# Altium PCB bloodhound_gprs_0_beta.PcbDoc
Units mil, origin at the board's own origin, x right, y up, seen from the top; angles counter-clockwise.
Board outline 1535.43 x 1889.76 mil, 2 copper layers (Top Layer, Bottom Layer); 33 components, 31 nets, 157 pads, 25 vias.
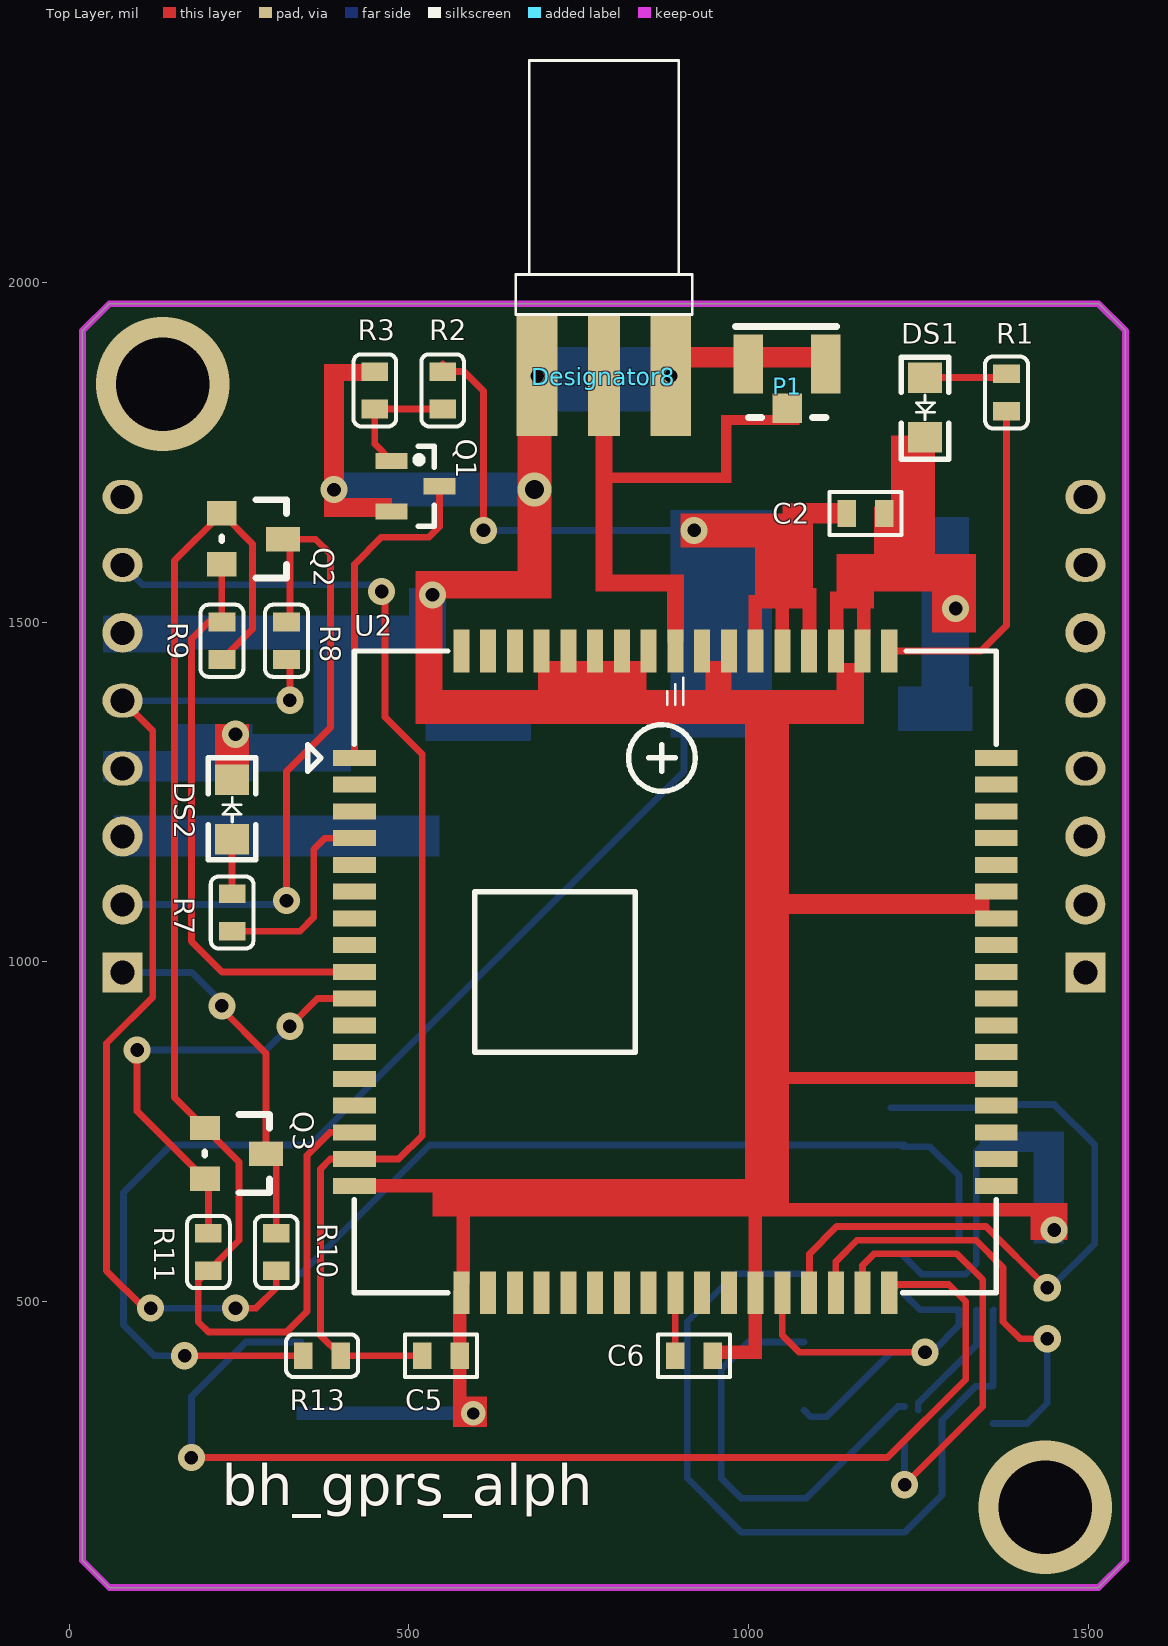
[diagram p0: Top Layer view]
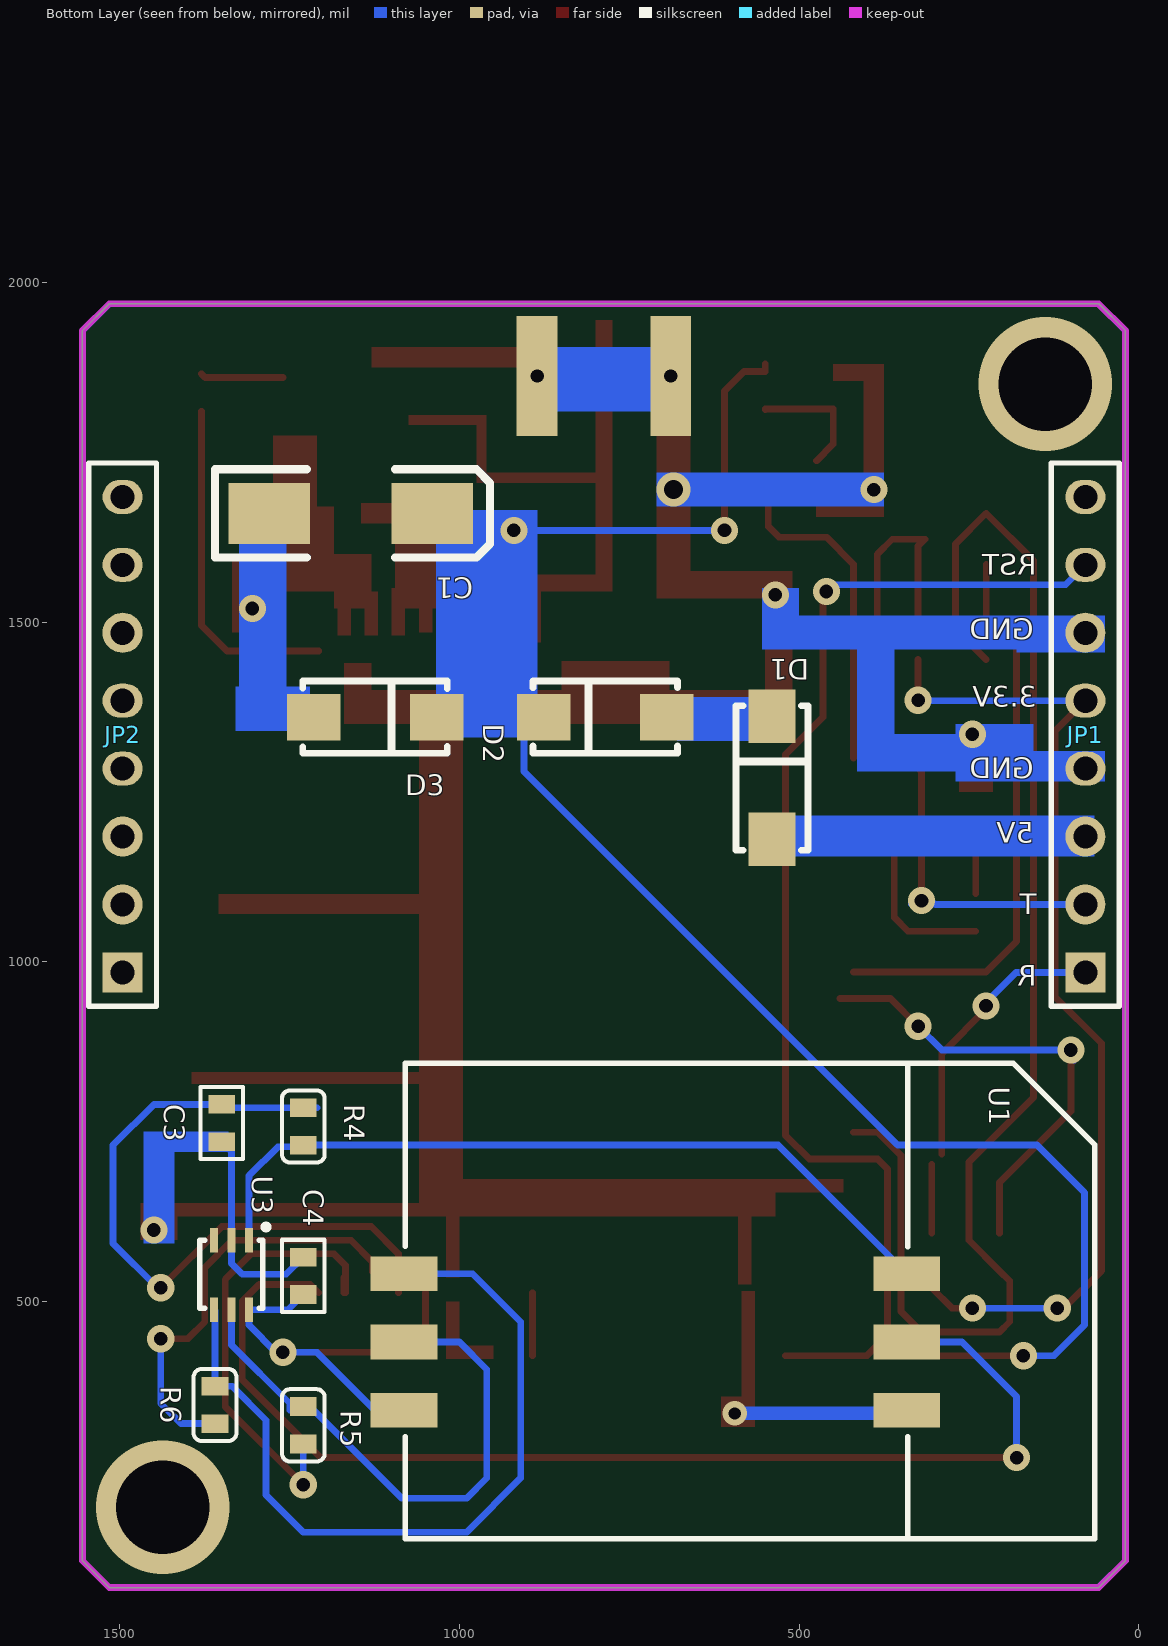
[diagram p1: Bottom Layer view, seen from below]
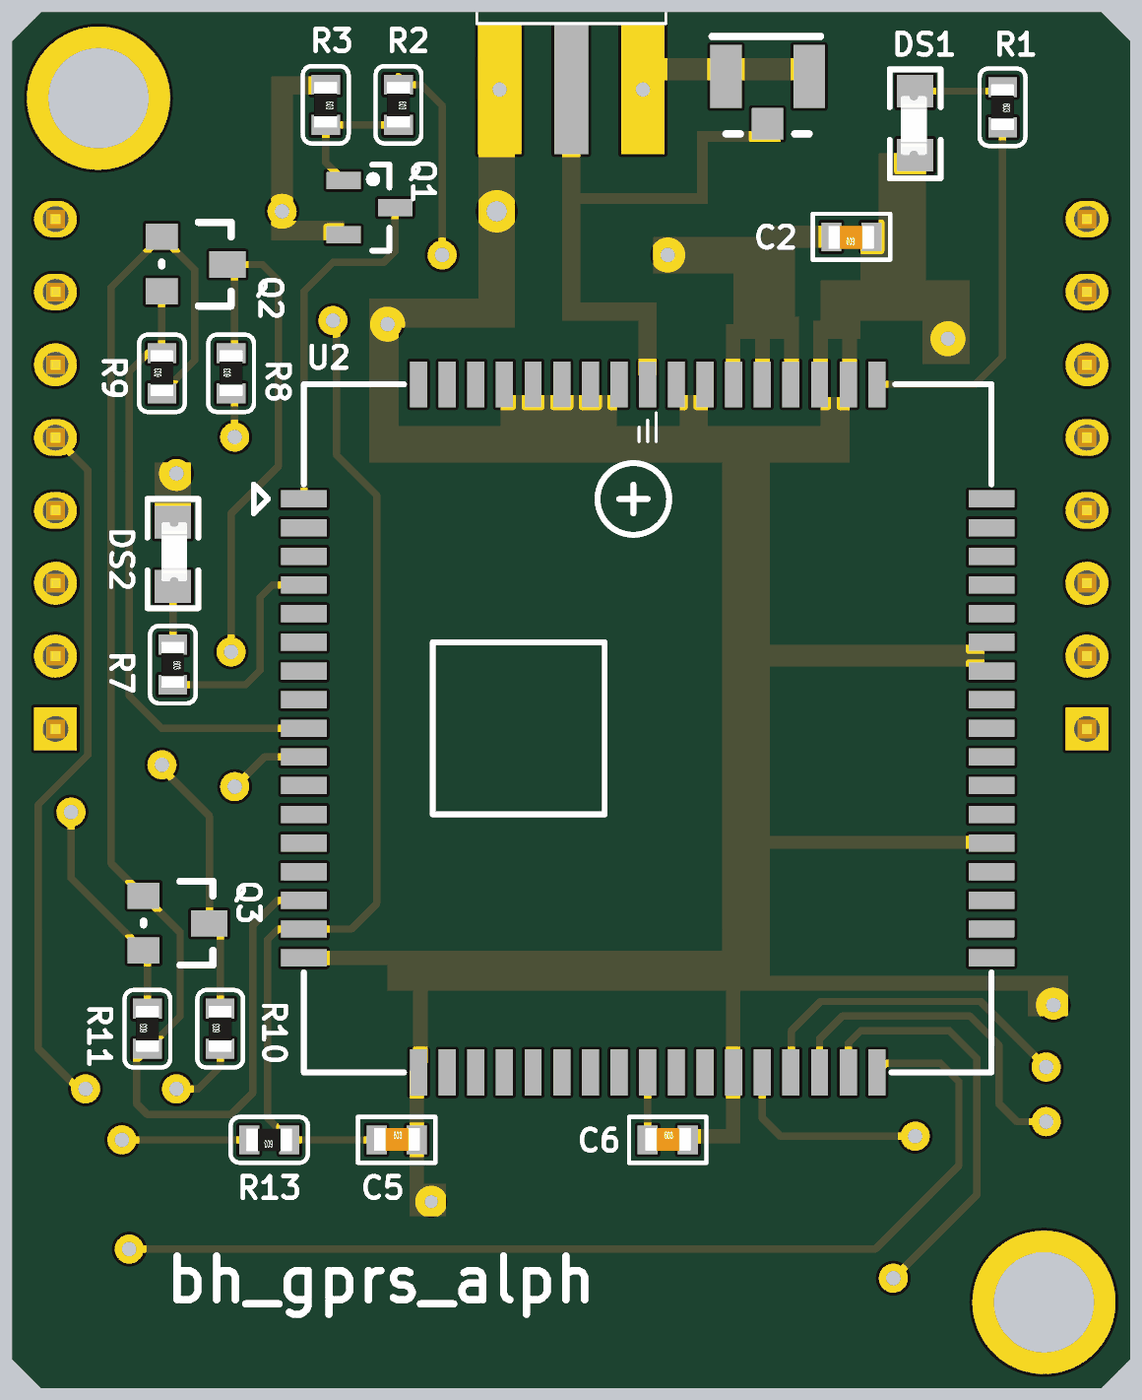
[diagram p2: 3D render of the assembled board from above, using the file's embedded part models]
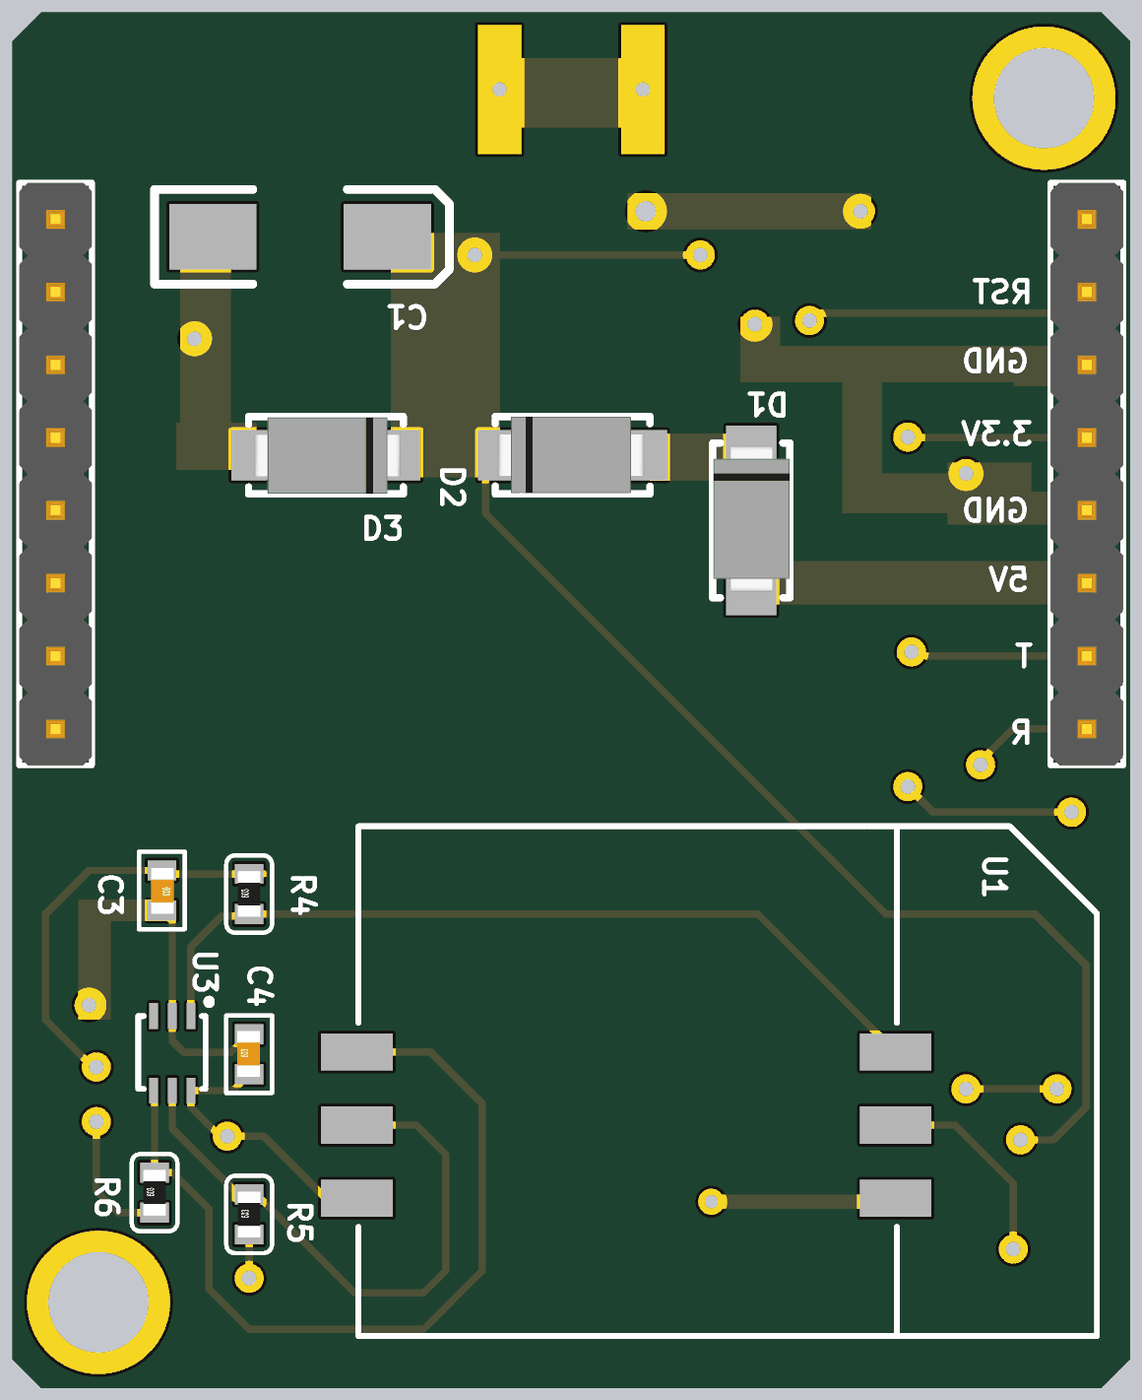
[diagram p3: 3D render of the assembled board from below, using the file's embedded part models]

## Layer stack, top to bottom
Top Layer: signal copper 1.4
Dielectric: dielectric 12.6, FR-4, Dk 4.8
Bottom Layer: signal copper 1.4

## Board outline
59.06,1968.5 1515.75,1968.5 1555.12,1929.13 1555.12,118.11 1515.75,78.74 59.06,78.74 59.05,78.74 19.68,118.11 19.68,1929.13

## Design rules (kind name [scope] priority, off if disabled: settings)
Clearance Clearance_1 [(InPolygon)] p1: gap=20
Clearance [All] p2: gap=10
HoleSize [All] p1: absolutevalues=TRUE maxlimit=1000 minlimit=1 maxpercent=80.000 minpercent=20.000
MinimumSolderMaskSliver [All] p1 off: minsoldermaskwidth=10
PolygonConnect [All] p1: connectstyle=Relief reliefconductorwidth=10 reliefentries=4 polygonreliefangle="90 Angle"
RoutingVias [All] p1: holewidth=20 width=40 viastyle="Through Hole" minholewidth=15 minwidth=30 maxholewidth=28 maxwidth=500
SilkscreenOverComponentPads [All] p1 off: minsilkscreentomaskgap=10
SolderMaskExpansion [All] p1: expansion=4
Width Width_1 [InNet('GND') OR InNet('VCC') OR  InNet('VCC_5V')] p1: maxlimit=30 minlimit=10 preferedwidth=30 minimp=50.000000 maximp=50.000000 favimp=50.000000
Width [All] p2: maxlimit=30 minlimit=10 preferedwidth=10 minimp=50.000000 maximp=50.000000 favimp=50.000000
25 further rules are at their usual default settings.

## Components (designator, comment, footprint, x,y, rotation, side; value= is the part's Value field where it differs from the comment)
C1 "470uf" C7343 1040,1660 r180 bottom
C2 "0.1uF" C0603 1200,1660 r180 top
C3 "22PF" C0603 1349.99,790 r270 bottom
C4 "0.1uF" C0603 1230,510 r90 bottom
C5 "0.1uF" C0603 520,420 r0 top
C6 "0.1uF" C0603 892.44,420 r0 top
D1 "SS34" DO-214 540,1180 r90 bottom
D2 "SS34" DO-214 695,1360 r0 bottom
D3 "D-SMBJ5.0CA" DO-214 1215,1360 r180 bottom
Designator8 "Comment" SMA-2 787.4,1862.2 r270 top
DS1 "LED GREEN" D0805 1260,1860 r270 top
DS2 "LED GREEN" D0805 240,1180 r90 top
JP1 "Socket1-A" SIP1X8X2.54 78.74,984.25 r90 bottom
JP2 "Socket1B" SIP1X8X2.54 1496.06,984.25 r90 bottom
P1 "SMA-2" IPX 1000,1880 r0 top
Q1 "9013" SOT23-3L 510,1700 r0 top
Q2 "RTR020P02" TSMT3 225,1659.96 r270 top
Q3 "RTR020P02" TSMT3 200,755 r270 top
R1 "10k" R0603 1380,1865.46 r270 top
R2 "10k" R0603 550,1868.7 r270 top
R3 "10k" R0603 450,1868.7 r270 top
R4 "22" R0603 1230,730 r90 bottom
R5 "22" R0603 1230,290 r90 bottom
R6 "22" R0603 1360,320 r90 bottom
R7 "1k" R0603 240,1100 r270 top
R8 "1k" R0603 320,1445 r90 top
R9 "1k" R0603 225,1445 r90 top
R10 "1k" R0603 305,545 r90 top
R11 "1k" R0603 205,545 r90 top
R13 "10k" R0603 400,420 r180 top
U1 "SIM" SIM 440,540.63 r90 bottom
U2 "SIM900" GSM_900A 420,1300 r0 top
U3 "SMF05C" SOT-363 1310,590 r270 bottom

## Footprints (in the part's own frame and the unit in brackets; to place one, negate y for a bottom-side part, rotate by r counter-clockwise, add the part's x,y. Pads: shape width x height; smd on the part's side, far side on the other; paste and mask are expansions set on the pad)
C0603 [mm]
  rect 0.7x1 smd: 1(0,0) 2(1.4,0)
  silkscreen extent -0.65,-0.8 2.05,0.8, body extent -0.09,-0.38 1.51,0.42, height 0.3
C7343 [mil]
  rect 120x90 smd: 1(0,0) 2(-240,0)
  silkscreen extent -320,-65 85,65
D0805 [mil]
  rect 45x50 smd: A(0,0) K(88,0)
  silkscreen extent -30,-35 120,35, body extent 7,-20 88,16, height 33
DO-214 [mm]
  rect 2x1.75 smd: 1(0,0) 2(4.6,0)
  silkscreen extent -0.4,-1.35 5,1.35, body extent -0.2,-1.34 4.91,1.33, height 2.12
GSM_900A [mm]
  rect 1.6x0.6 smd: 1(0,0) 2(0,-1) 3(0,-2) 4(0,-3) 5(0,-4) 6(0,-5) 7(0,-6) 8(0,-7) 9(0,-8) 10(0,-9) 11(0,-10) 12(0,-11) 13(0,-12) 14(0,-13) 15(0,-14) 16(0,-15) 17(0,-16) 35(24,-16) 36(24,-15) 37(24,-14) 38(24,-13) 39(24,-12) 40(24,-11) 41(24,-10) 42(24,-9) 43(24,-8) 44(24,-7) 45(24,-6) 46(24,-5) 47(24,-4) 48(24,-3) 49(24,-2) 50(24,-1) 51(24,0)
  rect 0.6x1.6 smd: 18(4,-20) 19(5,-20) 20(6,-20) 21(7,-20) 22(8,-20) 23(9,-20) 24(10,-20) 25(11,-20) 26(12,-20) 27(13,-20) 28(14,-20) 29(15,-20) 30(16,-20) 31(17,-20) 32(18,-20) 33(19,-20) 34(20,-20) 52(20,4) 53(19,4) 54(18,4) 55(17,4) 56(16,4) 57(15,4) 58(14,4) 59(13,4) 60(12,4) 61(11,4) 62(10,4) 63(9,4) 64(8,4) 65(7,4) 66(6,4) 67(5,4) 68(4,4)
  silkscreen extent -1.75,-20 24,4
IPX [mm]
  rect 1.1x1.1 smd: 1(1.45,-1.65)
  rect 1.1x2.2 smd: 2(0,0) 2(2.9,0)
  silkscreen extent -0.48,-2 3.3,1.4
R0603 [mm]
  rect 0.7x1 smd: 1(0,0) 2(1.4,0)
  silkscreen extent -0.65,-0.8 2.05,0.8, body extent -0.1,-0.4 1.5,0.4, height 0.3
SIM [mm]
  rect 1.3x2.5 smd: 1(0,-2.5) 2(-2.55,-2.5) 3(-5.1,-2.5) 4(0,16.306) 5(-2.55,16.306) 6(-5.1,16.306)
  silkscreen extent -9.91,-9.53 7.87,16.25
SIP1X8X2.54 [mm] "Connector; Header; 8 Position"
  rect 1.5x1.5 hole 0.9: 1(0,0)
  round 1.5 hole 0.9: 2(2.54,0) 3(5.08,0) 6(12.7,0)
  oval 1.27x1.5 hole 0.9: 4(7.62,0) 5(10.16,0) 7(15.24,0) 8(17.78,0)
  silkscreen extent -1.27,-1.27 19.05,1.27, body extent -1.27,-1.27 19.05,1.27, height 0.7
SMA-2 [mm]
  rect 4.5x1.2 smd: 1(0,0)
  rect 4.5x1.524 hole 0.5: 2(0,2.5) 2(0,-2.5)
  silkscreen extent -11.8,-3.3 -2.3,3.3
SOT23-3L [mm] "SOT23, 3-Leads, Body 2.9x1.3mm, Pitch 0.95mm, Lead Span 2.5mm, IPC High Density"
  rect 1.2x0.6 smd: 1(-0.9,0.95) 2(-0.9,-0.95) 3(0.9,0)
  silkscreen extent 0,-1.5 0.7,1.5, body extent -0.7,-1.5 0.7,1.5, height 1.1
SOT-363 [mm]
  rect 0.9x0.3 smd: 1(0,0) 2(0,-0.65) 3(0,-1.3) 4(2.6,-1.3) 5(2.6,-0.65) 6(2.6,0)
  silkscreen extent -0.51,-1.84 2.54,0.64
TSMT3 [mil]
  rect 36x44 smd: 1(-0.24,-0.24) 2(74.76,-0.24)
  rect 36x50 smd: 3(38,90)
  silkscreen extent -20,0 95,95, body extent -24,15 99,69, height 43

## Part data
C1: library part CAP-T, "钽电容"
C2 C3 C4 C5 C6: library part CAP-SMD, "SMD-CAP"
D1 D2: library part DIODE, "Diode"
D3 U3: "TVS"
DS1 DS2: library part LED
JP1 JP2: library part SIP1X8, "2.0排针"
P1: library part BNC, "IPX"
Q1: library part NPN, "NPN Transistor"
Q2 Q3: library part "MOSFET P", "P MOSFET"
R1 R2 R3 R4 R5 R6 R7 R8 R9 R10 R11 R13: library part RES, "Resistor"
U1: "手机SIM卡"

## Via types
v1: diameter 40, hole 20, Top Layer to Bottom Layer, 21 vias
v2: diameter 196.85, hole 137.8, Top Layer to Bottom Layer, 2 vias
v3: diameter 36, hole 18, Top Layer to Bottom Layer, 1 vias
v4: diameter 50, hole 28, Top Layer to Bottom Layer, 1 vias

## Nets (pads, with @x,y where several pads share a name; then routed paths per layer and width w, separated by ;. In a path a pad name is that pad's centre, name@x,y a point inside that pad or via, vN(x,y) a via of type N, cw(c..) or ccw(c..) an arc to the next point about the centre after c; other vN are vias at no path point)
EX_RXD3: 
EX_TXD3: 
GND: C1.2 C2.1 C3.2 C4.2 C5.2 C6.2 D3.1 Designator8.2 DS1.K DS2.K JP1.4 JP1.6 P1.2 Q1.2 R3.1 U1.3 U2.17 U2.18 U2.29 U2.39 U2.45 U2.46 U2.53 U2.54 U2.58 U2.59 U2.61 U2.62 U2.63 U2.64 U2.65 U3.2 | length 329.1
  Top Layer w30: Designator8.2@887.4,1889.76 Designator8.2@897.64,1900
  Bottom Layer w10: C4.2@1225.12,570 C4.2 1255.12,540 1320,540 1335.59,555.59 U3.2 1335.59,720.47 C3.2
  other v1: 1450,605 245,1335 1305,1520 535,1540 390,1695
  other v3: 595,335
  other v4: 685,1695
NetC6_1: C6.1 U2.26 | length 92.6
  Top Layer w10: C6.1 U2.26
NetD1_2: D1.2 D2.1
NetDS1_A: DS1.A R1.1 | length 122.3
  Top Layer w10: DS1.A 1374.54,1860 R1.1
NetDS2_A: DS2.A R7.1 | length 80
  Top Layer w10: R7.1 DS2.A
NetP1_2: Designator8.1 P1.1 U2.60
NetQ1_B: Q1.1 R2.2 R3.2 | length 187.1
  Top Layer w10: Q1.1 450,1761.97 R3.2 R2.2 R2.2@550,1812.83
NetQ2_2: Q2.2 R9.2 U2.9 | length 843.8
  Top Layer w10: Q2.2 224.76,1500.35 205.35,1500.35 180,1475 180,1030 224.96,985.04 U2.9 U2.9
NetQ3_2: Q3.2 R11.2 U2.10 | length 705.9
  Top Layer w10: v1(100,870) 100,860 95,855 100,850 100,780 Q3.2 205,675 R11.2 ; v1(325,905) 365.67,945.67 U2.10@440,945.67
  Bottom Layer w10: v1@95,855 100,860 v1(100,870) 290,870 v1(325,905)
NetR1_2: R1.2 U2.52 | length 503.5
  Top Layer w10: U2.52 1342.48,1457.48 1380,1495 R1.2
NetR4_1: R4.1 U1.1 U3.1 | length 1169
  Bottom Layer w10: U1.1 530.94,730 R4.1@1225,730 ; U3.1 1310,685 1267.5,727.5 R4.1@1227.5,727.5 ; R4.1@1225,730 R4.1@1227.5,727.5 ; R4.1@1225,730 R4.1 R4.1@1227.5,727.5
NetR5_2: R5.2 U1.5 U3.5 | length 820.1
  Bottom Layer w10: U1.5 1000.24,440.24 960,400 960,240 990,210 1085,210 1220.12,345.12 R5.2 ; 1250,340 1250,350 1335.59,435.59 U3.5
NetR6_2: R6.2 U1.4 U3.4 | length 1180.9
  Bottom Layer w10: U1.4 980.63,540.63 910,470 910,240 990,160 1230,160 1285,215 1285,325 1335.12,375.12 R6.2 1360,486.46 U3.4
NetR7_2: R7.2 U2.4 | length 315.3
  Top Layer w10: R7.2 339.88,1044.88 360,1065 360,1165 376.89,1181.89 U2.4@440,1181.89
PWRKEY: Q1.3 U2.1 | length 493
  Top Layer w10: U2.1 420,1585 460,1625 530,1625 545.43,1640.43 Q1.3
RXD0: JP2.2
SIM900_RST: C5.1 JP1.7 R13.1 U2.16 | length 1846.8
  Top Layer w10: 460,709.45 U2.16@440,709.45 ; v1(460,1545) 460,1555 465,1550 465,1360 520,1305 520,744.3 485.15,709.45 U2.16@440,709.45 ; C5.1 R13.1 370,450 370,695 384.45,709.45 U2.16@440,709.45
  Bottom Layer w10: JP1.7 107.99,1555 460,1555 v1(460,1545)
SIM_CLK: R6.1 U2.32 | length 633.7
  Top Layer w10: U2.32@1128.66,543.66 1128.66,558.66 1160,590 1335,590 1375,550 1375,470 1400,445 v1(1440,445)
  Bottom Layer w10: R6.1 1410,320 1440,350 v1(1440,445)
SIM_DATA: C3.1 R4.2 U2.31 | length 1030
  Top Layer w10: U2.31@1090,512.6 1090,570 1130,610 1350,610 v1(1440,520)
  Bottom Layer w10: 1210,785.12 R4.2 1345.11,785.12 C3.1 1450,790 1510,730 1510,585 1445,520 v1(1440,520)
SIM_RST: R5.1 U2.33 | length 672.1
  Top Layer w10: U2.33 1168.03,553.03 1185,570 1306.85,570 1345,531.85 1345,345 v1(1230,230) ; U2.33@1170,512.6 U2.33@1170,535
  Bottom Layer w10: v1(1230,230) R5.1
SIM_RX: JP1.1 Q3.3 R10.2 | length 520.9
  Top Layer w10: v1@222.5,932.5 290,865 Q3.3 ; R10.2 Q3.3@305,702
  Bottom Layer w10: JP1.1@82.99,980 JP1.1 180.75,984.25 215,950 215,945 v1(225,935)
SIM_TX: JP1.2 Q2.3 R8.2 | length 1015.6
  Top Layer w10: v1(320,1090) 320,1280 385,1345 385,1600 363.04,1621.96 Q2.3 325,1611.96 R8.2@325,1500.12
  Bottom Layer w10: JP1.2 299.25,1084.25 300,1085 335,1085 330,1090 v1(320,1090)
SIM_VDD: C4.1 U1.6 U2.30 U3.6 | length 686.4
  Top Layer w10: U2.30@1050,512.6 1050,450 1075,425 v1(1260,425)
  Bottom Layer w10: U1.6 1091.81,330 1115,330 1210,425 1270,425 1310,465 U3.6 1252.36,487.64 C4.1 C4.1@1227.5,512.5
SIM_VPP: U1.2 U2.34 | length 1715.5
  Top Layer w10: v1(180,270) 1205,270 1320,385 1320,500 1295,525 1219.8,525 U2.34
  Bottom Layer w10: v1(180,270) 180,360 260.24,440.24 U1.2
TXD0: JP2.1 | length 33.9
  Bottom Layer w10: JP2.1 JP2.1@1520,960.31
VCC: C1.1 C2.2 D2.2 D3.2 R2.1 R13.2 U2.55 U2.56 U2.57 | length 2663.2
  Top Layer w10: v1(170,420) R13.2 ; R2.1@550,1880 R2.1 581.3,1868.7 610,1840 v1(610,1635)
  Bottom Layer w10: v1(170,420) 125,420 80,465 80,660 150,730 355,730 905,1280 905,1520 965,1580 ; v1(610,1635) 910,1635 965,1580 ; v1(920,1635) 960,1635 965,1640 965,1580 ; 960,1580 965,1580
VCC_3.3V: JP1.5 R8.1 R10.1 | length 1502.8
  Top Layer w10: JP1.5 123.27,1339.72 123.27,948.27 55,880 55,545 110,490 v1(120,490) ; v1(245,490) 275,490 305,520 R10.1 ; v1(325,1385) R8.1@325,1445
  Bottom Layer w10: JP1.5 324.25,1384.25 v1(325,1385) ; v1(120,490) v1(245,490)
VCC_5V: D1.1 JP1.3
VDD_EXT: Q2.1 Q3.1 R9.1 R11.1 U2.15 | length 2028.5
  Top Layer w10: R9.1 270,1490 270,1614.96 Q2.1 155,1590.43 155,800 Q3.1 250,705 250,590 R11.1 190,530 190,470 205,455 320,455 350,485 350,715 383.82,748.82 U2.15
pads on no net: JP1.8 JP2.3 JP2.4 JP2.5 JP2.6 JP2.7 JP2.8 U2.2 U2.3 U2.5 U2.6 U2.7 U2.8 U2.11 U2.12 U2.13 U2.14 U2.19 U2.20 U2.21 U2.22 U2.23 U2.24 U2.25 U2.27 U2.28 U2.35 U2.36 U2.37 U2.38 U2.40 U2.41 U2.42 U2.43 U2.44 U2.47 U2.48 U2.49 U2.50 U2.51 U2.66 U2.67 U2.68 U3.3
copper on no net:
  other v2: 1437.01,196.85 137.8,1850.39

## Keep-outs
Keep-Out Layer:
  the board outline again, w10

## Other copper
Top Layer:
  rectangle net GND: 565,315 615,360
  rectangle net GND: 1160,1480 1180,1545
  rectangle net GND: 1120,1480 1140,1545
  rectangle net VCC: 1080,1480 1100,1550
  rectangle net VCC: 1040,1485 1060,1540
  rectangle net VCC: 1000,1485 1020,1540
  rectangle net GND: 1130,1385 1170,1440
  rectangle net GND: 1415,590 1470,645
  rectangle net GND: 1045,625 1420,645
  rectangle net GND: 1000,415 1020,500
  rectangle net GND: 390.43,1655 475,1682.4
  rectangle net GND: 380,1855 450,1880
  rectangle net GND: 375,1655 405,1880
  rectangle net GND: 1270,1485 1335,1590
  rectangle net GND: 660,1540 710,1860
  rectangle net GND: 510,1535 710,1575
  rectangle net GND: 510,1350 550,1575
  rectangle net VCC: 1010,1520 1095,1660
  rectangle net GND: 936.81,1370 975,1442.52
  rectangle net GND: 1130,1520 1185,1600
  region net GND: 1355,1100 1010,1100 1010,1070 1355,1070
  rectangle net GND: 1014.88,820 1395,837.44
  rectangle net GND: 1155,1545 1335,1600
  rectangle net GND: 690.59,1385 850,1442.48
  rectangle net GND: 510,1350 1170,1400
  rectangle net GND: 995,645 1060,1360
  rectangle net GND: 535,625 1060,680
  rectangle net GND: 570,525 590,665
  rectangle net GND: 1000,535 1020,690
  rectangle net GND: 1185,1570 1230,1670
  rectangle net GND: 435,660 575,680
  rectangle net GND: 950,415 1010,435
  region net GND: 585,320 585,515 565,515 565,320
  rectangle net VCC: 900,1610 1045,1660
  region net GND: 265,1250 265,1350 215,1350 215,1250
  rectangle net NetP1_2: 880,1470 905,1565
  rectangle net NetP1_2: 775,1545 905,1570
  rectangle net NetP1_2: 775,1545 800,1945
  region net GND: 1130,1875 1130,1905 887.4,1905 887.4,1875
  rectangle net NetP1_2: 785,1705 975,1720
  rectangle net NetP1_2: 960,1705 975,1805
  rectangle net NetP1_2: 960,1790 1075,1805
  rectangle net VCC: 1050,1645 1145,1675
  rectangle net GND: 1210,1575 1275,1775
Bottom Layer:
  rectangle net GND: 335,325 605,345
  rectangle net GND: 1340,720 1465,750
  rectangle net GND: 1420,585 1465,745
  rectangle net GND: 375,1670 710,1720
  rectangle net GND: 1255,1385 1325,1655
  rectangle net GND: 500,1460 555,1550
  rectangle net GND: 155,1460 525,1510
  rectangle net GND: 50,1265 175,1310
  rectangle net GND: 50,1455 180,1510
  rectangle net GND: 1220,1340 1330,1405
  rectangle net VCC: 885,1330 1035,1665
  rectangle net NetD1_2: 525,1325 680,1390
  rectangle net VCC_5V: 65,1155 545,1215
  rectangle net GND: 155,1265 270,1350
  rectangle net GND: 235,1280 415,1335
  rectangle net GND: 360,1315 415,1495
  rectangle net GND: 680,1810 895,1905

## Silkscreen, mask and mechanical layers (free items; w line width, h text height)
Top Overlay:
  text "bh_gprs_alph" at 225,200 h60
Bottom Overlay:
  text "RST" at 150,1570 h30
  text "GND" at 155,1475 h30
  text "3.3V" at 150,1375 h30
  text "GND" at 155,1270 h30
  text "5V" at 155,1175 h30
  text "T" at 150,1070 h30
  text "R" at 150,965 h30